# EAGLE board hopperBoardV2 (EAGLE 9.5.0)
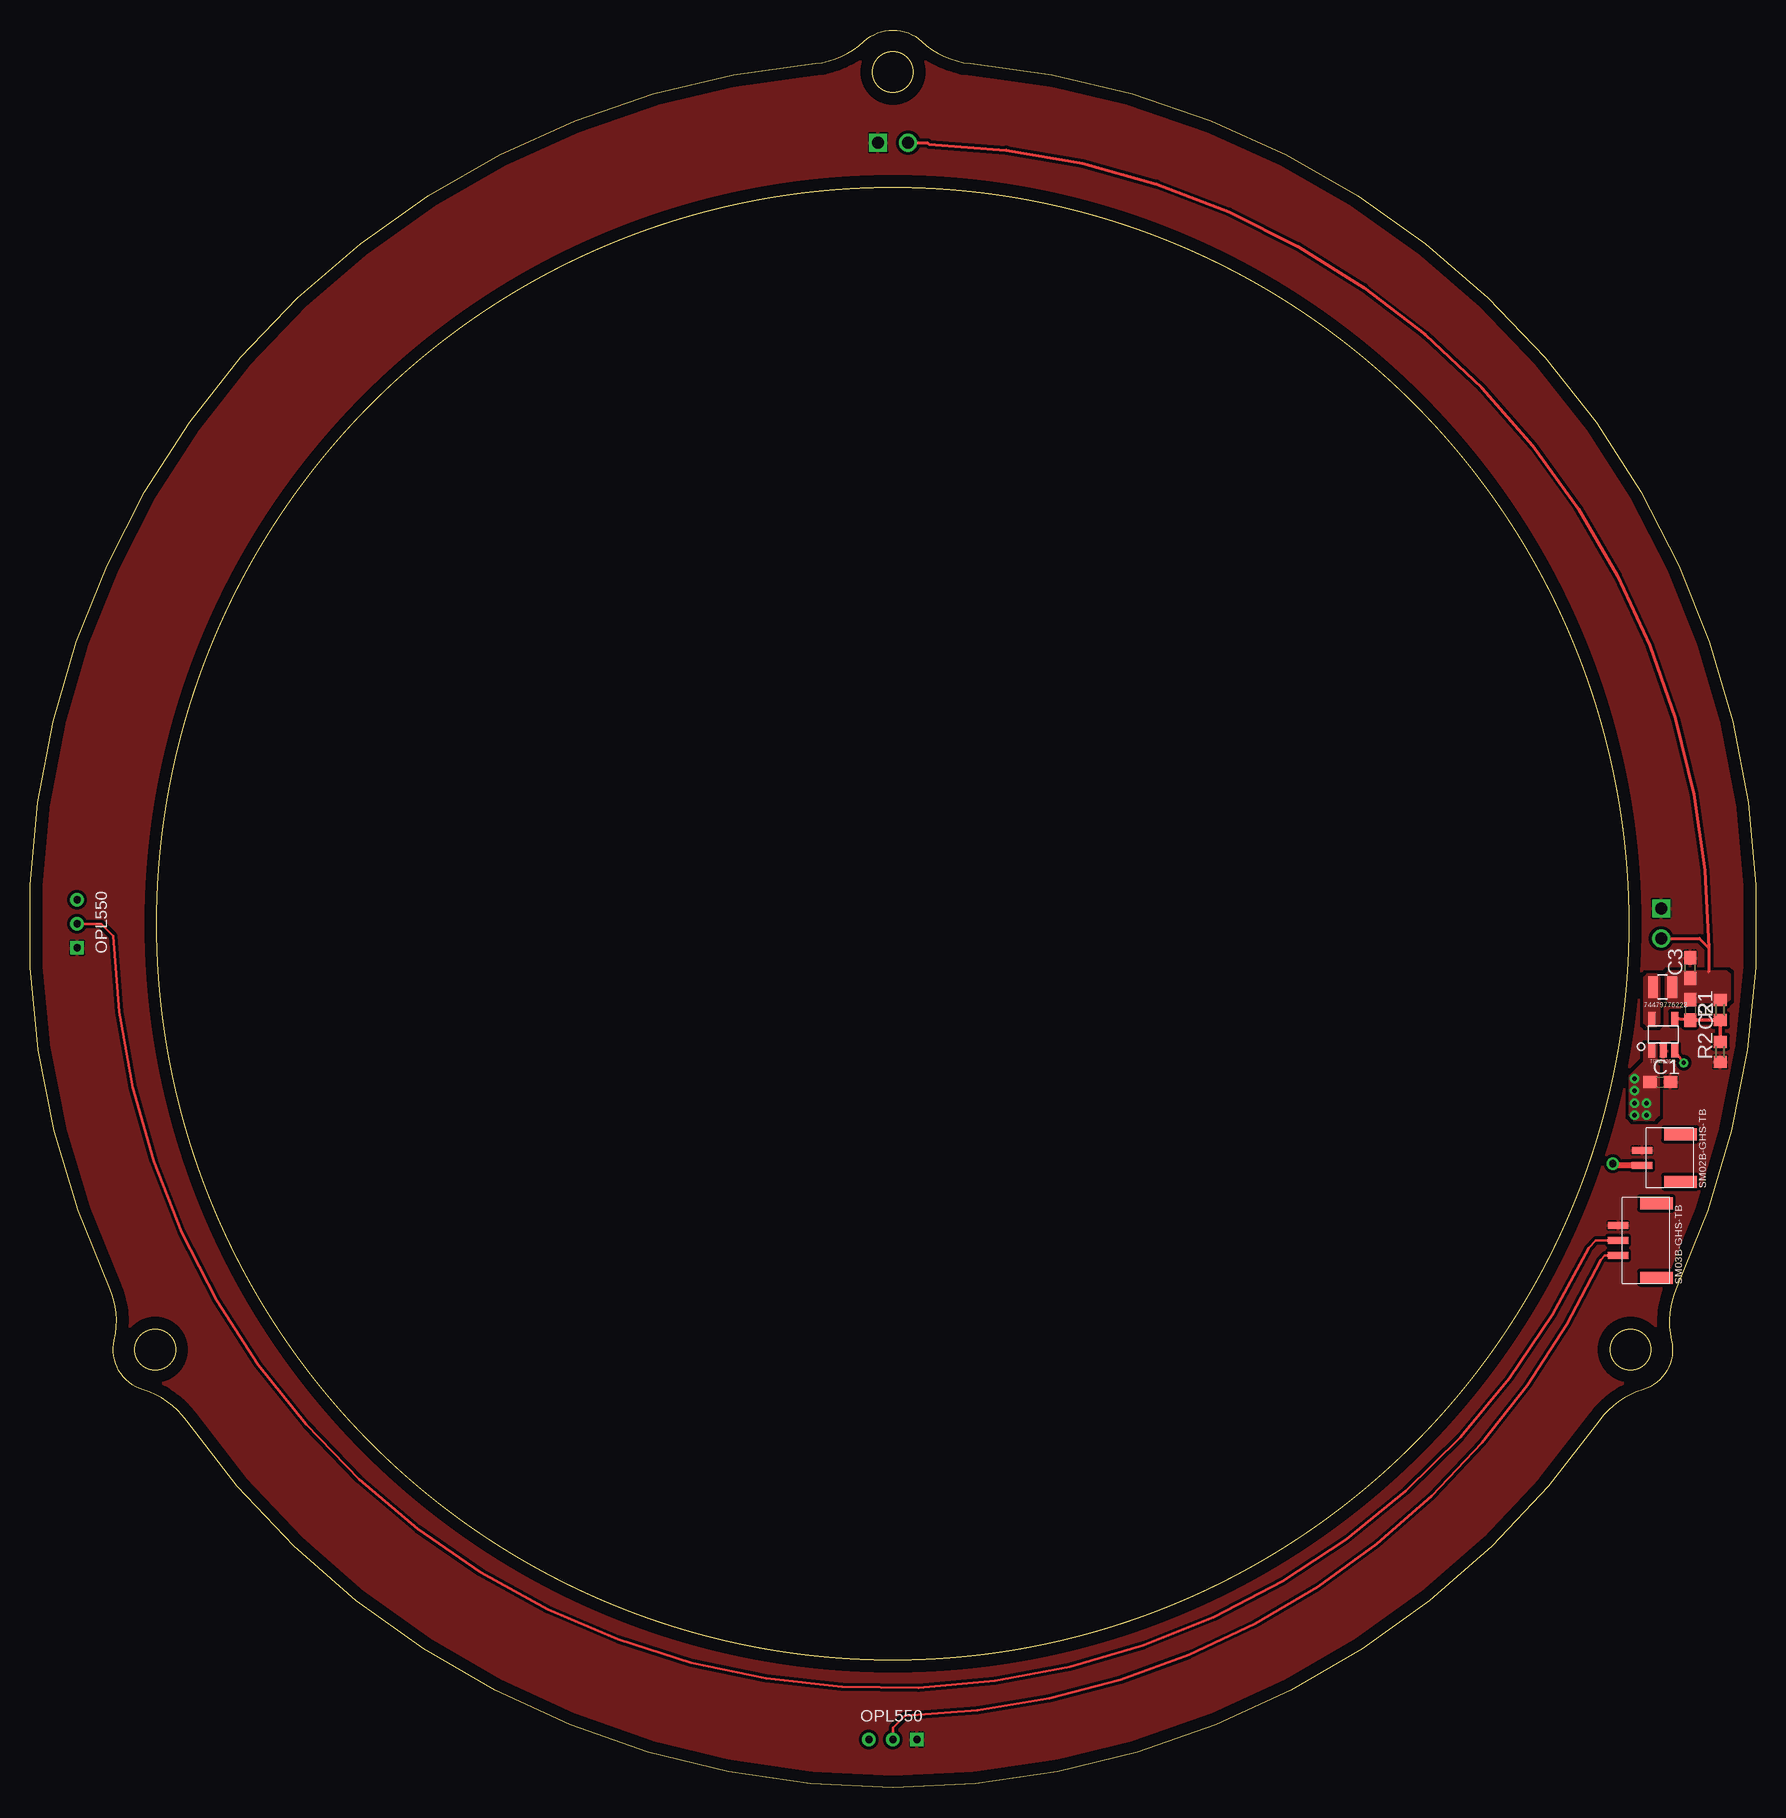
[diagram p0: board, top side]
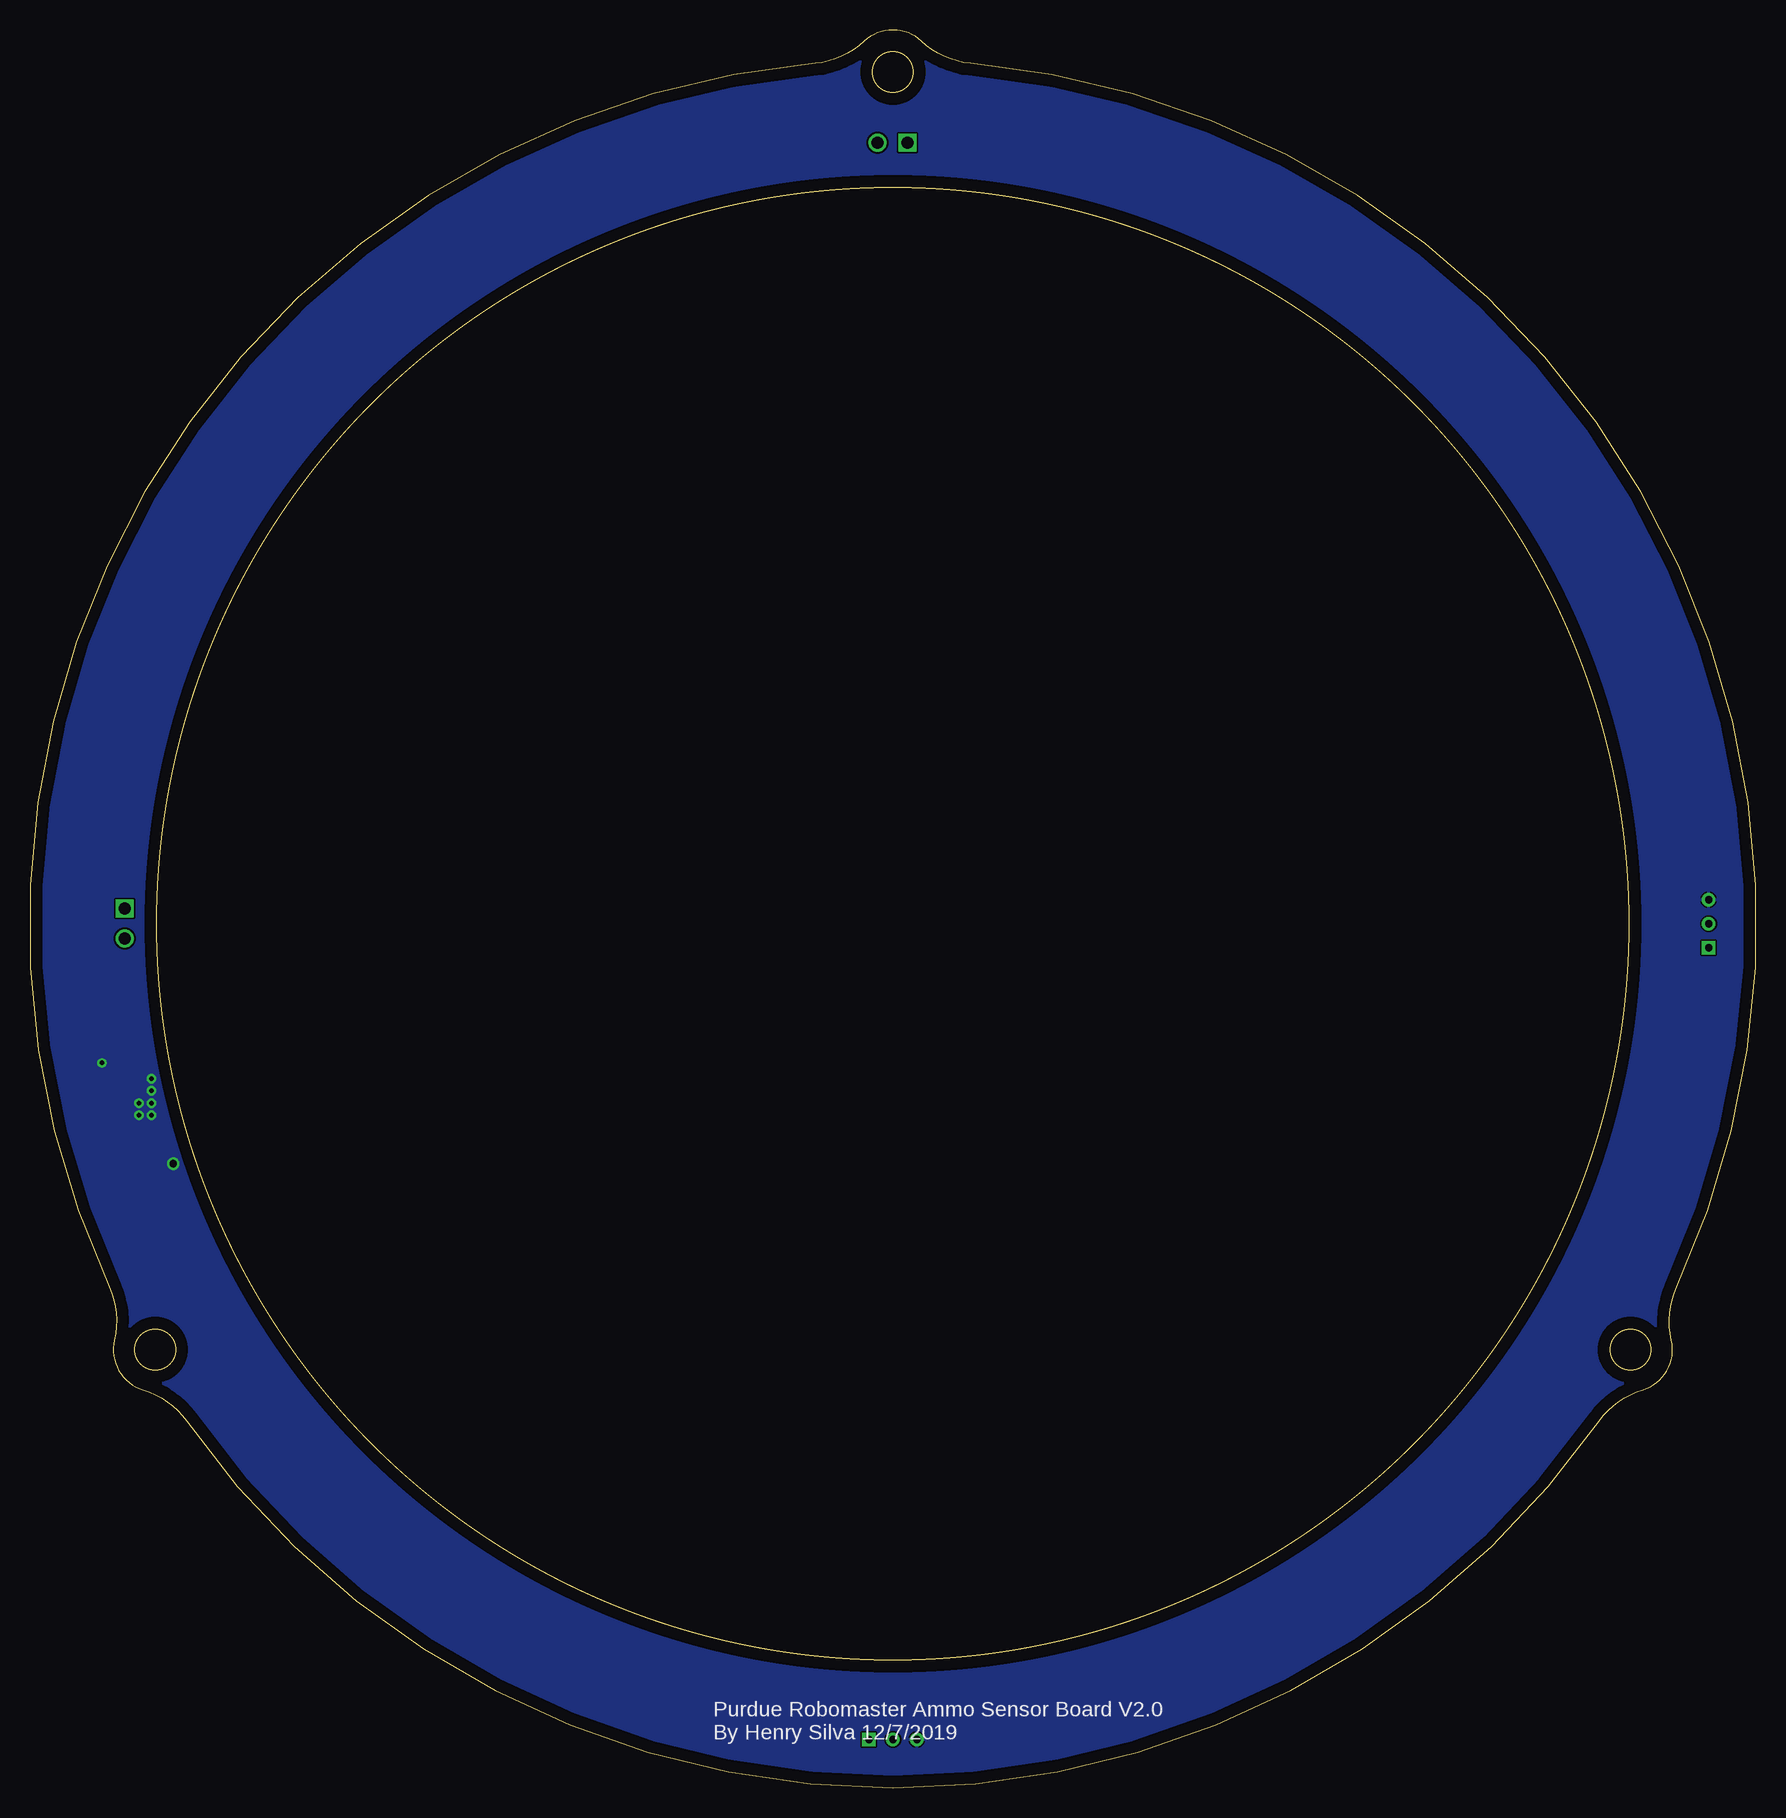
[diagram p1: board, bottom side, seen from below]

Size 143.86 x 146.5 mm. Coordinates in mm from the lower left corner, seen from the top.
Outline: 130.81,30.56 arc-110 13.05,30.56 arc37 9.42,33.15 arc-86 7.03,37.29 arc37 6.6,41.73 arc-110 65.48,143.71 arc37 69.54,145.56 arc-86 74.32,145.56 arc37 78.38,143.71 arc-110 137.26,41.73 arc37 136.83,37.29 arc-86 134.44,33.15 arc37 130.81,30.56
Outline: circle at 71.93,72 radius 61.36
Outline: circle at 133.42,36.5 radius 1.7
Outline: circle at 10.44,36.5 radius 1.7
Outline: circle at 71.93,143 radius 1.7
Copper layers (1*16): Top 0.035mm / dielectric 1.5mm / Bottom 0.035mm
Design rules "default *": minimum track width 6mil, minimum drill 0.35mm, track to track 6mil, track to pad 6mil, pad to pad 6mil, via to via 6mil, smd to smd 6mil, copper to edge 40mil, drill to drill 6mil, minimum pad ring 10mil, minimum via ring 8mil, stop-mask expansion 4mil, vias tented up to drill 22mil, thermal gap 5mil

## Footprints (pad centres in the part's own frame; a part is rotated, then mirrored left to right if it is on the bottom)
C0603 = smd 1.1 x 1: 1 -0.85,0; 2 0.85,0
R0603 = smd 1 x 1.1: 1 -0.85,0; 2 0.85,0
2PIN = drill 1 square: P$1 0,0 | drill 1: P$2 2.5,0
OPL550 = drill 0.6 square: P$1 0,0 | drill 0.6: P$2 2,0; P$3 4,0
TPS62260 = smd 0.6 x 1.1: P$1 0.3,0.6; P$2 1.25,0.6; P$3 2.2,0.6; P$4 2.2,3.3; P$5 0.3,3.3
SM02B-GHS-TB = smd 1 x 2.7: P$1 0.5,1.35; P$2 4.45,1.35 | smd 0.6 x 1.7: P$3 1.85,4.55; P$4 3.1,4.55
SM03B-GHS-TB = smd 1 x 2.7: P$1 0.5,1.35; P$2 6.7,1.35 | smd 0.6 x 1.7: P$3 2.35,4.55; P$4 3.6,4.55; P$5 4.85,4.55
74479776222 = smd 0.8 x 1.8: P$1 0.4,0.9; P$2 2,0.9

## Placement (x,y rotation side)
C1  4.7uF  [C0603]  135.89,58.81 0 top
C2  22pF  [C0603]  138.39,64.81 270 top
C3  10uF  [C0603]  138.39,68.31 90 top
R1  330k  [R0603]  140.89,64.81 90 top
R2  180k  [R0603]  140.89,61.31 90 top
U$1  2PIN  [2PIN]  135.97,73.28 270 top
U$2  2PIN  [2PIN]  70.7,137.1 0 top
U$3  OPL550  [OPL550]  73.93,4 180 top
U$4  OPL550  [OPL550]  3.93,70 90 top
U$5  TPS62260  [TPS62260]  134.89,60.81 0 top
U$6  SM02B-GHS-TB  [SM02B-GHS-TB]  138.93,50 90 top
U$8  SM03B-GHS-TB  [SM03B-GHS-TB]  136.93,42 90 top
U$9  2.2uH  [74479776222]  134.89,65.81 0 top

## Library data of the parts
C1-C3 = rcl; SPICEPREFIX: C
R1 R2 = rcl; SPICEPREFIX: R
U$1-U$6 U$8 U$9 = _HenrySilva

## Nets
1.5V: C2.1 C3.1 R1.2 U$1.P$2 U$2.P$2 U$9.P$2
5V: C1.1 U$3.P$3 U$4.P$3 U$5.P$1 U$5.P$3 U$6.P$3
AMMO1: U$4.P$2 U$8.P$4
AMMO2: U$3.P$2 U$8.P$3
GND: C1.2 C3.2 R2.1 U$1.P$1 U$2.P$1 U$3.P$1 U$4.P$1 U$5.P$2 U$6.P$4 U$8.P$5
N$1: U$5.P$5 U$9.P$1
N$4: C2.2 R1.1 R2.2 U$5.P$4

## Tracks (layer width: path | path; a pad name or v marks a point on that pad's centre or on a via)
1.5V
  Top 0.254: U$1.P$2 139.15,70.78 139.93,70 | 139.93,70 139.93,68 | 139.93,70 arc88 74.93,137 74.83,137.1 U$2.P$2
  pour Top (no thermals): 136.33,65.75 136.59,65.49 141.41,65.49 141.67,65.75 141.67,67.78 141.41,68.03 136.59,68.03 136.33,67.78
5V  (via drill 0.35, 0.38, 0.6)
  Top 0.203: v137.86,60.41 U$5.P$3
  Top 0.508: U$6.P$3 132.08,51.85 v131.93,52
  other vias: 133.74,59.09 133.74,58.08 133.74,57.06 134.76,57.06 134.76,56.04 133.74,56.04
  pour Bottom: -18.07,72 -18.07,162 161.93,162 161.93,-18 -18.07,-18
  pour Top (no thermals): 135.57,61.94 135.57,60.31 135.78,60.11 135.78,56.04 135.37,55.64 133.74,55.64 133.34,56.04 133.34,59.3 134.56,60.51 134.56,61.73 134.76,61.94
AMMO1
  Top 0.203: U$8.P$4 130.53,45.6 129.93,45 arc-153 6.93,71 5.93,72 U$4.P$2
AMMO2
  Top 0.203: U$8.P$3 131.28,44.35 130.93,44 arc-64 72.93,6 71.93,5 U$3.P$2
GND
  pour Top (isolate 0.254, rank 2): 71.93,160 159.93,160 159.93,72 159.93,-16 71.93,-16 -16.07,-16 -16.07,72 -16.07,160
N$1
  pour Top (no thermals): 135.83,63.71 135.83,67.52 135.57,67.78 134.81,67.78 134.56,67.52 134.56,63.71 134.81,63.46 135.57,63.46
N$4
  Top 0.305: R2.2 R1.1 C2.2 U$5.P$4

## Text on the board
bNames: Purdue Robomaster Ammo Sensor Board V2.0 / By Henry Silva 12/7/2019